# EAGLE board jduino_dualcoreV4 (EAGLE 5.06)
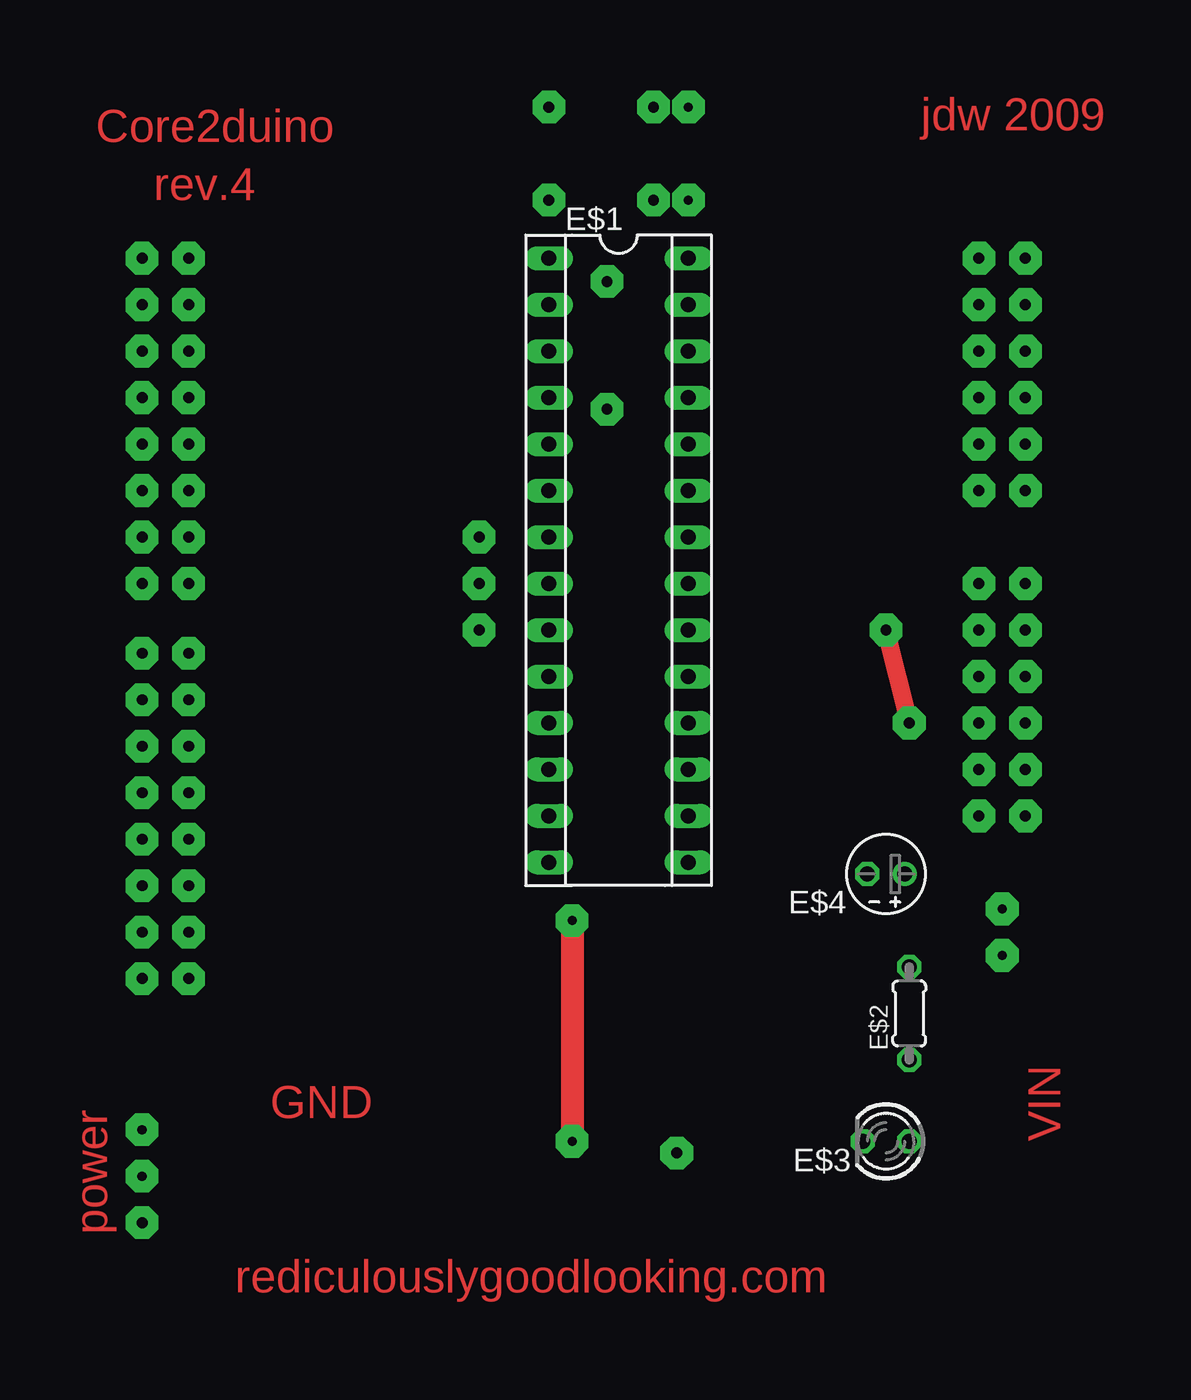
[diagram p0: board, top side]
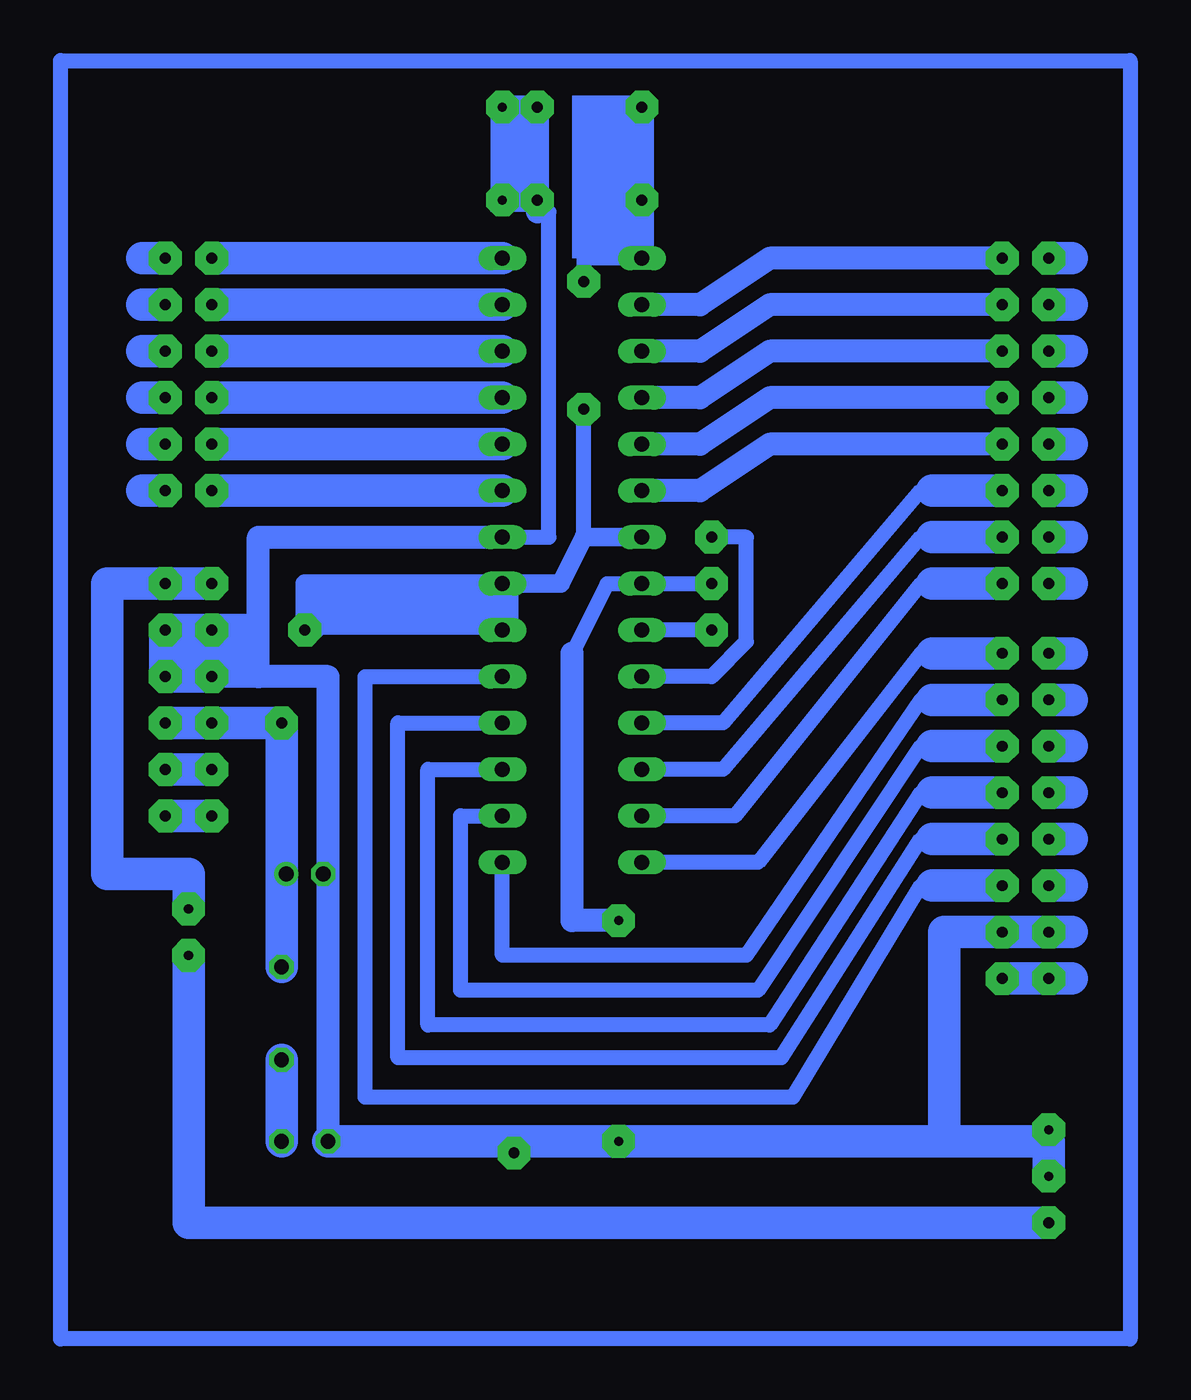
[diagram p1: board, bottom side, seen from below]

No outline drawn. Coordinates in mm, seen from the top.
Copper layers (1*16): Top 0.035mm / dielectric 1.5mm / Bottom 0.035mm
Design rules "default": minimum track width 10mil, minimum drill 24mil, track to track 8mil, track to pad 8mil, pad to pad 8mil, via to via 8mil, smd to smd 8mil, copper to edge 40mil, drill to drill 8mil, minimum pad ring 10mil, minimum via ring 8mil, stop-mask expansion 4mil, vias tented up to drill 0mil, thermal gap 10mil

## Footprints (pad centres in the part's own frame; a part is rotated, then mirrored left to right if it is on the bottom)
SOCKET-28-3 = drill 0.813 long: 1 -16.51,-3.81; 2 -13.97,-3.81; 3 -11.43,-3.81; 4 -8.89,-3.81; 5 -6.35,-3.81; 6 -3.81,-3.81; 7 -1.27,-3.81; 8 1.27,-3.81; 9 3.81,-3.81; 10 6.35,-3.81; 11 8.89,-3.81; 12 11.43,-3.81; 13 13.97,-3.81; 14 16.51,-3.81; 15 16.51,3.81; 16 13.97,3.81; 17 11.43,3.81; 18 8.89,3.81; 19 6.35,3.81; 20 3.81,3.81; 21 1.27,3.81; 22 -1.27,3.81; 23 -3.81,3.81; 24 -6.35,3.81; 25 -8.89,3.81; 26 -11.43,3.81; 27 -13.97,3.81; 28 -16.51,3.81
0204/5 = drill 0.813 octagon: 1 -2.54,0; 2 2.54,0
LED3MM = drill 0.813 octagon: A -1.27,0; K 1.27,0
E2-4 = drill 0.813 pad 1.27 round: + -1.016,0 | drill 0.813 pad 1.27 octagon: - 1.016,0

## Placement (x,y rotation side)
E$1  [SOCKET-28-3]  26.04,31.75 270 top
E$2  [0204/5]  41.91,6.99 90 top
E$3  [LED3MM]  40.64,0 180 top
E$4  [E2-4]  40.64,14.61 180 top

## Library data of the parts
E$1 = ic-package
E$2 = resistor
E$3 = led
E$4 = rcl

## Nets
DP0: E$1.2
DP1: E$1.3
DP2: E$1.4
DP3: E$1.5
DP4: E$1.6
GND: E$1.22
S$1: E$1.11
S$2: E$1.12
S$3: E$1.13
S$4: E$1.14
S$7: E$1.15
S$8: E$1.28
S$9: E$1.25
S$10: E$1.26
S$11: E$1.27
S$12: E$1.24
S$13: E$1.23
S$16: E$2.1 E$3.A
S$20: E$1.1
S$29: E$1.16
S$30: E$1.17
S$31: E$1.18
S$32: E$1.19
S$83: E$1.8
VCC: E$1.7 E$1.20 E$1.21 E$2.2
XTAL1: E$1.9
XTAL2: E$1.10

## Tracks (layer width: path | path; a pad name or v marks a point on that pad's centre or on a via)
DP0  (via drill 0.6 pad 1.78)
  Bottom 1.27: E$1.2 19.05,45.72 15.24,48.26 v2.54,48.26
DP1  (via drill 0.6 pad 1.78)
  Bottom 1.27: E$1.3 19.05,43.18 15.24,45.72 v2.54,45.72
DP2  (via drill 0.6 pad 1.78)
  Bottom 1.27: E$1.4 19.05,40.64 15.24,43.18 v2.54,43.18
DP3  (via drill 0.6 pad 1.78)
  Bottom 1.27: E$1.5 19.05,38.1 15.24,40.64 v2.54,40.64
DP4  (via drill 0.6 pad 1.78)
  Bottom 1.27: E$1.6 19.05,35.56 15.24,38.1 v2.54,38.1
GND  (via drill 0.5 pad 1.78, 0.6 pad 1.78)
  Bottom 0.406: 27.3,50.8 27.94,50.8
  Bottom 0.813: 27.3,50.8 27.3,33.02 E$1.22
  Bottom 1.27: 27.94,50.8 v27.94,56.52 | E$1.22 43.18,33.02 43.18,25.4 | 43.18,25.4 v45.72,25.4 | 43.18,25.4 39.37,25.4 39.37,0 | v0,0.64 0,0 5.71,0
  Bottom 1.778: 44.45,27.3 45.72,27.3 45.72,26.04 43.81,26.04 43.81,27.94 v48.26,27.94 | v48.26,27.94 48.26,26.04 | 48.26,26.04 v48.26,25.4 v45.72,25.4 | v45.72,25.4 v48.26,27.94 | v45.72,25.4 48.26,26.04 | v0,-1.91 0,0 39.37,0 | v2.54,11.43 v0,11.43 | v2.54,11.43 v0,11.43 | 5.71,0 5.71,11.43 v2.54,11.43 | v0,11.43 -1.27,11.43
S$1  (via drill 0.6 pad 1.78)
  Bottom 0.813: E$1.11 17.78,22.86 6.99,35.56 6.35,35.56
  Bottom 1.778: v2.54,35.56 6.35,35.56
S$2  (via drill 0.6 pad 1.78)
  Bottom 0.813: E$1.12 17.78,20.32 6.99,33.02 6.35,33.02
  Bottom 1.778: v2.54,33.02 6.35,33.02
S$3  (via drill 0.6 pad 1.78)
  Bottom 0.813: E$1.13 17.14,17.78 6.99,30.48 6.35,30.48
  Bottom 1.778: v2.54,30.48 6.35,30.48
S$4  (via drill 0.6 pad 1.78)
  Bottom 0.813: E$1.14 15.88,15.24 6.99,26.67 6.35,26.67
  Bottom 1.778: v2.54,26.67 6.35,26.67
S$5  (via drill 0.6 pad 1.78)
  other vias: 22.23,51.44
S$6  (via drill 0.6 pad 1.78)
  other vias: 27.94,51.44
S$7  (via drill 0.6 pad 1.78)
  Bottom 0.813: E$1.15 29.84,10.16 16.51,10.16 6.99,24.13 6.35,24.13
  Bottom 1.778: v2.54,24.13 6.35,24.13
S$8  (via drill 0.6 pad 1.78)
  Bottom 1.27: 41.91,48.26 v45.72,48.26
  Bottom 1.778: E$1.28 v45.72,48.26
S$9  (via drill 0.6 pad 1.78)
  Bottom 1.778: E$1.25 v45.72,40.64
S$10  (via drill 0.6 pad 1.78)
  Bottom 1.778: E$1.26 v45.72,43.18
S$11  (via drill 0.6 pad 1.78)
  Bottom 1.778: E$1.27 v45.72,45.72
S$12  (via drill 0.6 pad 1.78)
  Bottom 1.778: E$1.24 v45.72,38.1
S$13  (via drill 0.6 pad 1.78)
  Bottom 1.27: E$1.23 41.91,35.56
  Bottom 1.778: E$1.23 v45.72,35.56
S$14  (via drill 0.5 pad 1.78, 0.6 pad 1.78)
  Bottom 1.778: v0,-4.45 46.99,-4.45 v46.99,10.16
S$15  (via drill 0.6 pad 1.78)
  other vias: 45.72,27.94
S$16
  Bottom 1.778: E$3.A E$2.1
S$19  (via drill 0.5 pad 1.78)
  other vias: 29.84,51.44
S$20  (via drill 0.6 pad 1.78)
  Bottom 0.813: v25.4,46.99 25.4,48.26 E$1.1
  Bottom 1.27: E$1.1 v22.23,56.52
S$23  (via drill 0.6 pad 1.78)
  Bottom 1.778: v0,48.26 -1.27,48.26
S$24  (via drill 0.6 pad 1.78)
  Bottom 1.778: v0,30.48 -1.27,30.48
S$25  (via drill 0.6 pad 1.78)
  Bottom 1.778: v0,26.67 -1.27,26.67
S$26  (via drill 0.6 pad 1.78)
  Bottom 1.778: v2.54,8.89 v0,8.89 -1.27,8.89
S$27  (via drill 0.6 pad 1.78)
  Bottom 1.778: v48.26,48.26 49.53,48.26
S$28  (via drill 0.6 pad 1.78)
  other vias: 29.21,-0.64
S$29  (via drill 0.6 pad 1.78)
  Bottom 0.813: E$1.16 32.13,17.78 32.13,8.26 15.88,8.26 6.99,21.59 6.35,21.59
  Bottom 1.778: v2.54,21.59 6.35,21.59
S$30  (via drill 0.6 pad 1.78)
  Bottom 0.813: E$1.17 33.91,20.32 33.91,6.35 15.24,6.35 6.99,19.05 6.35,19.05
  Bottom 1.778: v2.54,19.05 6.35,19.05
S$31  (via drill 0.6 pad 1.78)
  Bottom 0.813: E$1.18 35.56,22.86 35.56,4.57 14.61,4.57 6.99,16.51 6.35,16.51
  Bottom 1.778: 6.35,16.51 v2.54,16.51
S$32  (via drill 0.6 pad 1.78)
  Bottom 0.813: E$1.19 37.34,25.4 37.34,2.41 13.97,2.41 6.99,13.97 6.35,13.97
  Bottom 1.778: 6.35,13.97 v2.54,13.97
S$33  (via drill 0.6 pad 1.78)
  Bottom 1.778: v48.26,35.56 49.53,35.56
S$35  (via drill 0.6 pad 1.78)
  Bottom 1.778: v45.72,17.78 v48.26,17.78
S$37  (via drill 0.6 pad 1.78)
  Bottom 1.778: v0,45.72 -1.27,45.72
S$38  (via drill 0.6 pad 1.78)
  Bottom 1.778: v0,43.18 -1.27,43.18
S$39  (via drill 0.6 pad 1.78)
  Bottom 1.778: v0,40.64 -1.27,40.64
S$40  (via drill 0.6 pad 1.78)
  Bottom 1.778: -0.64,38.1 v0,38.1 -1.27,38.1
S$41  (via drill 0.6 pad 1.78)
  Bottom 1.778: v0,35.56 -1.27,35.56
S$42  (via drill 0.6 pad 1.78)
  Bottom 1.778: v0,33.02 -1.27,33.02
S$43  (via drill 0.6 pad 1.78)
  Bottom 1.778: v0,24.13 -1.27,24.13
S$44  (via drill 0.6 pad 1.78)
  Bottom 1.778: v0,21.59 -1.27,21.59
S$45  (via drill 0.6 pad 1.78)
  Bottom 1.778: v0,19.05 -1.27,19.05
S$46  (via drill 0.6 pad 1.78)
  Bottom 1.778: v0,16.51 -1.27,16.51
S$47  (via drill 0.6 pad 1.78)
  Bottom 1.778: v0,13.97 -1.27,13.97
S$52  (via drill 0.6 pad 1.78)
  Bottom 1.778: v45.72,20.32 v48.26,20.32
S$53  (via drill 0.6 pad 1.78)
  Bottom 1.778: v48.26,38.1 49.53,38.1
S$54  (via drill 0.6 pad 1.78)
  Bottom 1.778: v48.26,40.64 49.53,40.64
S$55  (via drill 0.6 pad 1.78)
  Bottom 1.778: v48.26,43.18 49.53,43.18
S$56  (via drill 0.6 pad 1.78)
  Bottom 1.778: v48.26,45.72 49.53,45.72
S$80  (via drill 0.5 pad 1.78)
  other vias: 29.84,56.52
S$83  (via drill 0.5 pad 1.78, 0.6 pad 1.78)
  Top 1.27: v23.5,12.06 v23.5,0
  Bottom 0.813: v18.41,30.48 E$1.8 24.13,30.48 26.04,26.67
  Bottom 1.27: 26.04,26.67 26.04,12.06 v23.5,12.06
S$85  (via drill 0.5 pad 1.78, 0.6 pad 1.78)
  Bottom 1.778: v46.99,12.7 46.99,14.61 51.44,14.61 51.44,30.48 v48.26,30.48 v45.72,30.48
S$115
  Bottom 0.813: 53.98,59.05 -4.45,59.05 -4.45,-10.79 53.98,-10.79 53.98,59.05
VCC  (via drill 0.6 pad 1.78)
  Top 1.016: v41.91,22.86 v40.64,27.94
  Bottom 0.813: 29.84,28.57 E$1.20 | E$1.21 29.84,29.84 | 25.4,33.02 v25.4,40.01
  Bottom 1.016: v40.64,27.94 40.64,30.48 E$1.21 26.67,30.48 25.4,33.02 E$1.7
  Bottom 1.778: v48.26,22.86 v45.72,22.86 42.55,22.86 v41.91,22.86 E$2.2 | 39.37,28.57 30.48,28.57 | 39.37,28.57 40.01,28.57 v40.64,27.94 | 39.37,28.57 39.37,29.84 29.84,29.84 29.84,28.57
XTAL1  (via drill 0.6 pad 1.78)
  Bottom 0.813: v18.41,27.94 E$1.9
XTAL2  (via drill 0.6 pad 1.78)
  Bottom 0.813: E$1.10 18.41,25.4 16.51,27.3 16.51,33.02 v18.41,33.02
(copper drawn outside any net)
  shapes: Bottom area x2

## Text on the board
Top: Core2duino | jdw 2009 | rev.4 | GND | VIN | power | rediculouslygoodlooking.com